# Altium PCB PCB_Ala_AvionRC.PcbDoc
Units mm, origin at the board's own origin, x right, y up, seen from the top; angles counter-clockwise.
Board outline 237.5 x 33.33 mm, 2 copper layers (Top Layer, Bottom Layer), stack 1.571 mm thick; 11 components, 0 nets, 246 pads, 0 vias.
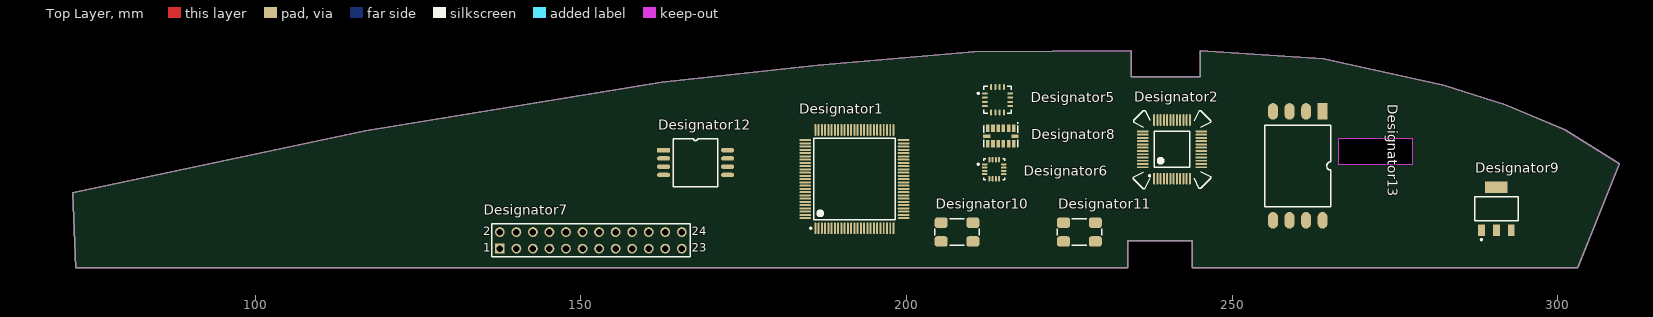
[diagram p0: Top Layer view]
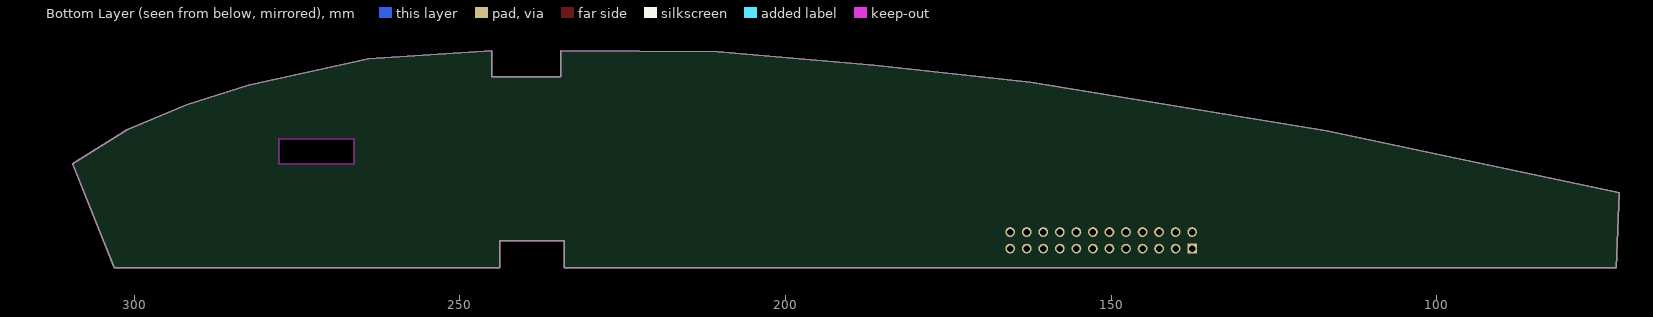
[diagram p1: Bottom Layer view, seen from below]

## Layer stack, top to bottom
Top Layer: signal copper 0.0356
Dielectric: core 1.5, FR-4, Dk 4.8
Bottom Layer: signal copper 0.0356

## Board outline
72.455,155.07 71.981,166.547 117.002,176.092 162.413,183.567 186.38,186.15 210.404,188.174 234.505,188.388 234.505,184.373 245.138,184.373 245.138,188.402 264.006,187.138 282.489,183.053 291.947,180.104 301.1,176.263 309.482,171.004 303.1,155.07 243.862,155.07 243.862,159.161 234,159.161 234,155.07
cut-out: 266.319,174.879 266.319,170.942 277.749,170.942 277.749,174.879

## Design rules (kind name [scope] priority, off if disabled: settings)
Clearance [All] p1: gap=0.254
PolygonConnect [All] p1: connectstyle=Relief reliefconductorwidth=0.254 reliefentries=4 polygonreliefangle="90 Angle"
RoutingVias [All] p1: holewidth=0.711 width=1.27 viastyle="Through Hole" minholewidth=0.711 minwidth=1.27 maxholewidth=0.711 maxwidth=1.27
SilkscreenOverComponentPads [All] p1: minsilkscreentomaskgap=0.254
SolderMaskExpansion [All] p1: expansion=0.102
Width [All] p1: maxlimit=0.254 minlimit=0.254 preferedwidth=0.254
27 further rules are at their usual default settings.

## Components (designator, comment, footprint, x,y, rotation, side; value= is the part's Value field where it differs from the comment)
Designator1 "Comment" "SOT407-1 LPC1768" 192.024,168.656 r0 top
Designator2 "Comment" TQFP48_LPC1343 240.792,173.228 r0 top
Designator5 "Comment" "QFN65P400X400-16 - L3G4200D" 213.995,180.848 r0 top
Designator6 "Comment" QFN50P300X300-16-HMC 213.487,170.18 r0 top
Designator7 "Comment" "HDR 2X12" 137.584,157.988 r0 top
Designator8 "Comment" LGA80P500X300-14N 214.503,175.26 r0 top
Designator9 "Comment" "SOT-223 - M3" 290.576,164.084 r0 top
Designator10 "Comment" SX6035 207.772,160.528 r0 top
Designator11 "Comment" SX6035 226.568,160.528 r0 top
Designator12 "Comment" SSOP1317 167.64,171.196 r0 top
Designator13 "Comment" "SSOP1351 - MPXV5004DP" 260.096,170.688 r270 top

## Footprints (in the part's own frame and the unit in brackets; to place one, negate y for a bottom-side part, rotate by r counter-clockwise, add the part's x,y. Pads: shape width x height; smd on the part's side, far side on the other; paste and mask are expansions set on the pad)
"HDR 2X12" [mm] "Connector; Header; 12x2 Position"
  rect 1.5x1.5 hole 1: 1(0,0)
  round 1.5 hole 1: 2(0,2.54) 3(2.54,0) 4(2.54,2.54) 5(5.08,0) 6(5.08,2.54) 7(7.62,0) 8(7.62,2.54) 9(10.16,0) 10(10.16,2.54) 11(12.7,0) 12(12.7,2.54) 13(15.24,0) 14(15.24,2.54) 15(17.78,0) 16(17.78,2.54) 17(20.32,0) 18(20.32,2.54) 19(22.86,0) 20(22.86,2.54) 21(25.4,0) 22(25.4,2.54) 23(27.94,0) 24(27.94,2.54)
  silkscreen extent -1.27,-1.27 29.21,3.81, body extent -1.27,-1.25 29.21,3.79, height 8.55
LGA80P500X300-14N [mm] "LGA, 14-Leads, Body 3x5x0.92mm, Pitch 0.8mm, IPC Medium Density"
  rect 0.55x1.145 smd: 1(2,1.175) 2(1.2,1.175) 3(0.4,1.175) 4(-0.4,1.175) 5(-1.2,1.175) 6(-2,1.175) 8(-2,-1.175) 9(-1.2,-1.175) 10(-0.4,-1.175) 11(0.4,-1.175) 12(1.2,-1.175) 13(2,-1.175)
  rect 1.145x0.55 smd: 7(-2.175,0) 14(2.175,0)
  silkscreen extent -2.6,-1.6 2.65,2.05, body extent -2.47,-1.49 2.53,1.51, height 1.03
QFN50P300X300-16-HMC [mm] "QFN, 16-Leads, Body 3x3mm, Pitch 0.5mm, IPC Medium Density"
  oval 0.85x0.3 smd: 1(-1.475,0.75) 2(-1.475,0.25) 3(-1.475,-0.25) 4(-1.475,-0.75) 9(1.475,-0.75) 10(1.475,-0.25) 11(1.475,0.25) 12(1.475,0.75)
  oval 0.3x0.85 smd: 5(-0.75,-1.475) 6(-0.25,-1.475) 7(0.25,-1.475) 8(0.75,-1.475) 13(0.75,1.475) 14(0.25,1.475) 15(-0.25,1.475) 16(-0.75,1.475)
  silkscreen extent -2.57,-1.6 1.6,1.6, body extent -1.5,-1.5 1.5,1.5, height 0.93
"QFN65P400X400-16 - L3G4200D" [mm] "16-Pin Plastic Quad Flat No-Lead 0.65 mm Pitch"
  oval 0.9x0.3 smd: 1(-1.95,0.975) 2(-1.95,0.325) 3(-1.95,-0.325) 4(-1.95,-0.975) 9(1.95,-0.975) 10(1.95,-0.325) 11(1.95,0.325) 12(1.95,0.975)
  oval 0.3x0.9 smd: 5(-0.975,-1.95) 6(-0.325,-1.95) 7(0.325,-1.95) 8(0.975,-1.95) 13(0.975,1.95) 14(0.325,1.95) 15(-0.325,1.95) 16(-0.975,1.95)
  silkscreen extent -3.07,-2.1 2.1,2.1, body extent -2,-2.01 2.01,2, height 1.03
"SOT407-1 LPC1768" [mm] "100-Pin Thin Quad Flat Pack 0.5 mm Pitch, IPC Medium Density"
  oval 0.3x1.8 smd: 1(-6,-7.55) 2(-5.5,-7.55) 3(-5,-7.55) 4(-4.5,-7.55) 5(-4,-7.55) 6(-3.5,-7.55) 7(-3,-7.55) 8(-2.5,-7.55) 9(-2,-7.55) 10(-1.5,-7.55) 11(-1,-7.55) 12(-0.5,-7.55) 13(0,-7.55) 14(0.5,-7.55) 15(1,-7.55) 16(1.5,-7.55) 17(2,-7.55) 18(2.5,-7.55) 19(3,-7.55) 20(3.5,-7.55) 21(4,-7.55) 22(4.5,-7.55) 23(5,-7.55) 24(5.5,-7.55) 25(6,-7.55) 51(6,7.55) 52(5.5,7.55) 53(5,7.55) 54(4.5,7.55) 55(4,7.55) 56(3.5,7.55) 57(3,7.55) 58(2.5,7.55) 59(2,7.55) 60(1.5,7.55) 61(1,7.55) 62(0.5,7.55) 63(0,7.55) 64(-0.5,7.55) 65(-1,7.55) 66(-1.5,7.55) 67(-2,7.55) 68(-2.5,7.55) 69(-3,7.55) 70(-3.5,7.55) 71(-4,7.55) 72(-4.5,7.55) 73(-5,7.55) 74(-5.5,7.55) 75(-6,7.55)
  oval 1.8x0.3 smd: 26(7.55,-6) 27(7.55,-5.5) 28(7.55,-5) 29(7.55,-4.5) 30(7.55,-4) 31(7.55,-3.5) 32(7.55,-3) 33(7.55,-2.5) 34(7.55,-2) 35(7.55,-1.5) 36(7.55,-1) 37(7.55,-0.5) 38(7.55,0) 39(7.55,0.5) 40(7.55,1) 41(7.55,1.5) 42(7.55,2) 43(7.55,2.5) 44(7.55,3) 45(7.55,3.5) 46(7.55,4) 47(7.55,4.5) 48(7.55,5) 49(7.55,5.5) 50(7.55,6) 76(-7.55,6) 77(-7.55,5.5) 78(-7.55,5) 79(-7.55,4.5) 80(-7.55,4) 81(-7.55,3.5) 82(-7.55,3) 83(-7.55,2.5) 84(-7.55,2) 85(-7.55,1.5) 86(-7.55,1) 87(-7.55,0.5) 88(-7.55,0) 89(-7.55,-0.5) 90(-7.55,-1) 91(-7.55,-1.5) 92(-7.55,-2) 93(-7.55,-2.5) 94(-7.55,-3) 95(-7.55,-3.5) 96(-7.55,-4) 97(-7.55,-4.5) 98(-7.55,-5) 99(-7.55,-5.5) 100(-7.55,-6)
  silkscreen extent -6.82,-7.67 6.25,6.25, body extent -8,-8 8,8, height 1.6
"SOT-223 - M3" [mm] "SOT-223/SC-73; 4 Leads; Body 6.7 x 7.3 mm, inc. leads (LxW max)"
  rect 1.05x1.75 smd: 1(-2.3,-3.3) 2(0,-3.3) 3(2.3,-3.3)
  rect 3.5x1.75 smd: 2(0,3.3)
  silkscreen extent -3.35,-4.85 3.35,1.85, body extent -3.32,-3.67 3.38,3.53, height 1.85
SSOP1317 [mm]
  rect 2x0.69 smd: 1(-4.915,1.905)
  oval 2x0.69 smd: 2(-4.915,0.635) 3(-4.915,-0.635) 4(-4.915,-1.905) 5(4.915,-1.905) 6(4.915,-0.635) 7(4.915,0.635) 8(4.915,1.905)
  silkscreen extent -3.4,-3.68 3.41,3.68, body extent -5,-3.6 5,3.6, height 4.11
"SSOP1351 - MPXV5004DP" [mm]
  rect 2.54x1.52 smd: 1(-8.36,3.81)
  oval 2.54x1.52 smd: 2(-8.36,1.27) 3(-8.36,-1.27) 4(-8.36,-3.81) 5(8.36,-3.81) 6(8.36,-1.27) 7(8.36,1.27) 8(8.36,3.81)
  silkscreen extent -6.25,-5.08 6.26,5.08, body extent -9.03,-6.03 9.03,12.57, height 10.05
SX6035 [mm]
  rrect50% 2x1.6 smd: 1(-2.44,-1.441) 2(2.441,-1.441) 3(2.441,1.441) 4(-2.44,1.441)
  silkscreen extent -3.43,-2.03 3.43,2.03, body extent -3,-1.75 3,1.75, height 1.05
TQFP48_LPC1343 [mm] "48-Pin Thin Quad Flat Pack 0.5 mm Pitch, IPC Medium Density"
  oval 0.3x1.8 smd: 1(-2.75,-4.5) 2(-2.25,-4.5) 3(-1.75,-4.5) 4(-1.25,-4.5) 5(-0.75,-4.5) 6(-0.25,-4.5) 7(0.25,-4.5) 8(0.75,-4.5) 9(1.25,-4.5) 10(1.75,-4.5) 11(2.25,-4.5) 12(2.75,-4.5) 25(2.75,4.5) 26(2.25,4.5) 27(1.75,4.5) 28(1.25,4.5) 29(0.75,4.5) 30(0.25,4.5) 31(-0.25,4.5) 32(-0.75,4.5) 33(-1.25,4.5) 34(-1.75,4.5) 35(-2.25,4.5) 36(-2.75,4.5)
  oval 1.8x0.3 smd: 13(4.5,-2.75) 14(4.5,-2.25) 15(4.5,-1.75) 16(4.5,-1.25) 17(4.5,-0.75) 18(4.5,-0.25) 19(4.5,0.25) 20(4.5,0.75) 21(4.5,1.25) 22(4.5,1.75) 23(4.5,2.25) 24(4.5,2.75) 37(-4.5,2.75) 38(-4.5,2.25) 39(-4.5,1.75) 40(-4.5,1.25) 41(-4.5,0.75) 42(-4.5,0.25) 43(-4.5,-0.25) 44(-4.5,-0.75) 45(-4.5,-1.25) 46(-4.5,-1.75) 47(-4.5,-2.25) 48(-4.5,-2.75)
  silkscreen extent -5.96,-6.04 5.96,5.96, body extent -4.5,-4.5 4.5,4.5, height 1.64

## Nets (pads, with @x,y where several pads share a name; then routed paths per layer and width w, separated by ;. In a path a pad name is that pad's centre, name@x,y a point inside that pad or via, vN(x,y) a via of type N, cw(c..) or ccw(c..) an arc to the next point about the centre after c; other vN are vias at no path point)
pads on no net: Designator1.1 Designator1.2 Designator1.3 Designator1.4 Designator1.5 Designator1.6 Designator1.7 Designator1.8 Designator1.9 Designator1.10 Designator1.11 Designator1.12 Designator1.13 Designator1.14 Designator1.15 Designator1.16 Designator1.17 Designator1.18 Designator1.19 Designator1.20 Designator1.21 Designator1.22 Designator1.23 Designator1.24 Designator1.25 Designator1.26 Designator1.27 Designator1.28 Designator1.29 Designator1.30 Designator1.31 Designator1.32 Designator1.33 Designator1.34 Designator1.35 Designator1.36 Designator1.37 Designator1.38 Designator1.39 Designator1.40 Designator1.41 Designator1.42 Designator1.43 Designator1.44 Designator1.45 Designator1.46 Designator1.47 Designator1.48 Designator1.49 Designator1.50 Designator1.51 Designator1.52 Designator1.53 Designator1.54 Designator1.55 Designator1.56 Designator1.57 Designator1.58 Designator1.59 Designator1.60 Designator1.61 Designator1.62 Designator1.63 Designator1.64 Designator1.65 Designator1.66 Designator1.67 Designator1.68 Designator1.69 Designator1.70 Designator1.71 Designator1.72 Designator1.73 Designator1.74 Designator1.75 Designator1.76 Designator1.77 Designator1.78 Designator1.79 Designator1.80 Designator1.81 Designator1.82 Designator1.83 Designator1.84 Designator1.85 Designator1.86 Designator1.87 Designator1.88 Designator1.89 Designator1.90 Designator1.91 Designator1.92 Designator1.93 Designator1.94 Designator1.95 Designator1.96 Designator1.97 Designator1.98 Designator1.99 Designator1.100 Designator2.1 Designator2.2 Designator2.3 Designator2.4 Designator2.5 Designator2.6 Designator2.7 Designator2.8 Designator2.9 Designator2.10 Designator2.11 Designator2.12 Designator2.13 Designator2.14 Designator2.15 Designator2.16 Designator2.17 Designator2.18 Designator2.19 Designator2.20 Designator2.21 Designator2.22 Designator2.23 Designator2.24 Designator2.25 Designator2.26 Designator2.27 Designator2.28 Designator2.29 Designator2.30 Designator2.31 Designator2.32 Designator2.33 Designator2.34 Designator2.35 Designator2.36 Designator2.37 Designator2.38 Designator2.39 Designator2.40 Designator2.41 Designator2.42 Designator2.43 Designator2.44 Designator2.45 Designator2.46 Designator2.47 Designator2.48 Designator5.1 Designator5.2 Designator5.3 Designator5.4 Designator5.5 Designator5.6 Designator5.7 Designator5.8 Designator5.9 Designator5.10 Designator5.11 Designator5.12 Designator5.13 Designator5.14 Designator5.15 Designator5.16 Designator6.1 Designator6.2 Designator6.3 Designator6.4 Designator6.5 Designator6.6 Designator6.7 Designator6.8 Designator6.9 Designator6.10 Designator6.11 Designator6.12 Designator6.13 Designator6.14 Designator6.15 Designator6.16 Designator7.1 Designator7.2 Designator7.3 Designator7.4 Designator7.5 Designator7.6 Designator7.7 Designator7.8 Designator7.9 Designator7.10 Designator7.11 Designator7.12 Designator7.13 Designator7.14 Designator7.15 Designator7.16 Designator7.17 Designator7.18 Designator7.19 Designator7.20 Designator7.21 Designator7.22 Designator7.23 Designator7.24 Designator8.1 Designator8.2 Designator8.3 Designator8.4 Designator8.5 Designator8.6 Designator8.7 Designator8.8 Designator8.9 Designator8.10 Designator8.11 Designator8.12 Designator8.13 Designator8.14 Designator9.1 Designator9.2 Designator9.3 Designator10.1 Designator10.2 Designator10.3 Designator10.4 Designator11.1 Designator11.2 Designator11.3 Designator11.4 Designator12.1 Designator12.2 Designator12.3 Designator12.4 Designator12.5 Designator12.6 Designator12.7 Designator12.8 Designator13.1 Designator13.2 Designator13.3 Designator13.4 Designator13.5 Designator13.6 Designator13.7 Designator13.8

## Keep-outs
Keep-Out Layer:
  the board outline again, w0.2

## Text inside footprints (layer, text, board x,y; h text height)
Designator7: Top Overlay "24" at 167.048,160.02 h1.27; Top Overlay "23" at 167.048,157.48 h1.27; Top Overlay "2" at 135.044,160.02 h1.27; Top Overlay "1" at 135.044,157.48 h1.27